# Altium PCB LTM4625.PcbDoc
Units mil, origin at the board's own origin, x right, y up, seen from the top; angles counter-clockwise.
Board outline 2220 x 625 mil, 2 copper layers (Top Layer, Bottom Layer); 31 components, 12 nets, 109 pads, 48 vias.
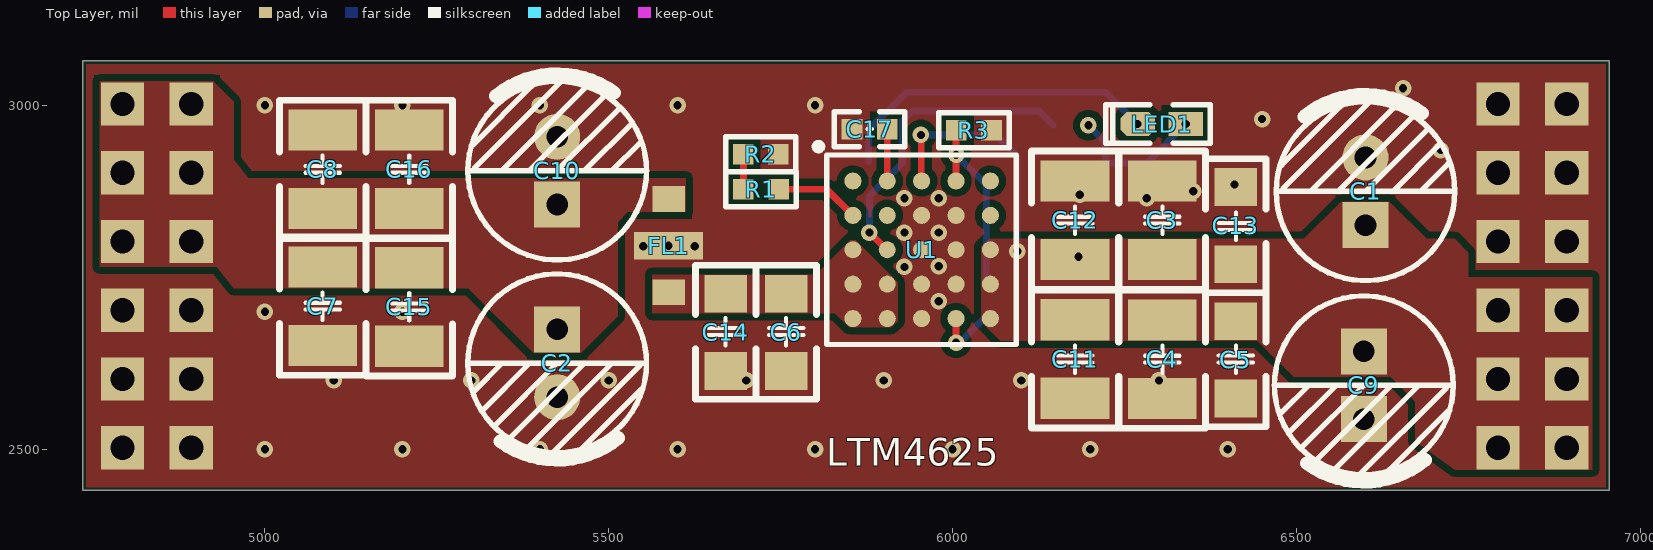
[diagram p0: Top Layer view]
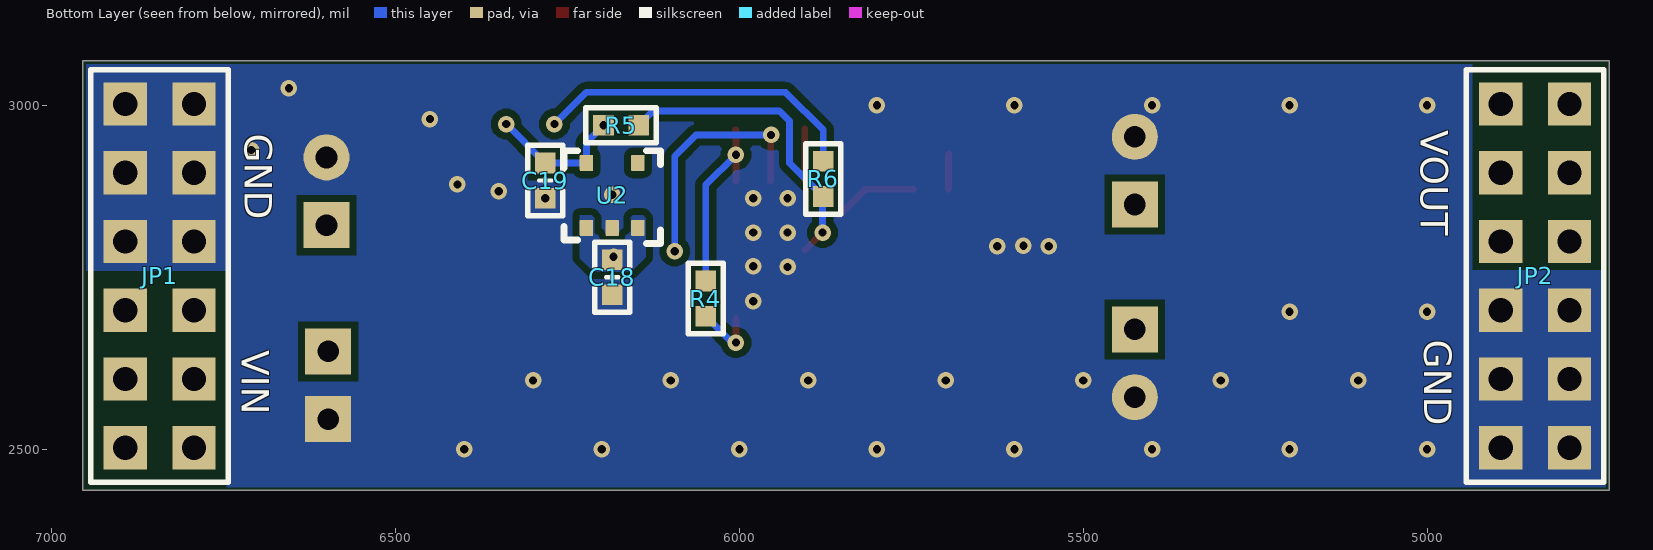
[diagram p1: Bottom Layer view, seen from below]

## Layer stack, top to bottom
Top Solder: solder mask 0.4, Solder Resist, Dk 3.5
Top Layer: signal copper 1.4
Dielectric 1: dielectric 12.6, FR-4, Dk 4.8
Bottom Layer: signal copper 1.4
Bottom Solder: solder mask 0.4, Solder Resist, Dk 3.5

## Board outline
4735,2440 6955,2440 6955,3065 4735,3065

## Design rules (kind name [scope] priority, off if disabled: settings)
Clearance [All] p1: gap=10 ignorepadtopadclearanceinfootprint=FALSE except(0: Arc-Hole Track-Hole SMDPad-Hole THPad-Hole Via-Hole Fill-Hole Poly-Hole Region-Hole Text-Hole)
PlaneConnect [All] p1: planeconnectstyle=Direct reliefexpansion=20 reliefentries=4 reliefconductorwidth=10 reliefairgap=10
PolygonConnect [All] p1: connectstyle=Direct reliefconductorwidth=10 reliefentries=4 polygonreliefangle="90 Angle" airgapwidth=10
RoutingVias [All] p1: holewidth=28 width=50 viastyle="Through Hole" minholewidth=28 minwidth=50 maxholewidth=28 maxwidth=50
SolderMaskExpansion [All] p1: expansion=4 istentingtop=FALSE
Width [All] p1: maxlimit=10 minlimit=10 preferedwidth=10
29 further rules are at their usual default settings.

## Components (designator, comment, footprint, x,y, rotation, side; value= is the part's Value field where it differs from the comment)
C1 "100uF" "CAP 2.5*6.3*7"#1 6600.42,2875.05 r90 top
C2 "100uF" "CAP 2.5*6.3*7"#1 5425,2625 r270 top
C3 "10uF" "C 1210_L" 6305,2833 r90 top
C4 "10uF" "C 1210_L" 6305,2630.91 r270 top
C5 "22uF" "C 1206_L" 6412,2631 r270 top
C6 "22uF" "C 1206_L" 5758,2671 r270 top
C7 "10uF" "C 1210_L" 5084,2707.91 r270 top
C8 "10uF" "C 1210_L" 5084,2907 r90 top
C9 "100uF" "CAP 2.5*6.3*7"#2 6598,2593 r270 top
C10 "100uF" "CAP 2.5*6.3*7"#1 5425,2905 r90 top
C11 "10uF" "C 1210_L" 6178,2631 r270 top
C12 "10uF" "C 1210_L" 6178,2833 r90 top
C13 "22uF" "C 1206_L" 6412,2824 r90 top
C14 "22uF" "C 1206_L" 5670,2671 r270 top
C15 "10uF" "C 1210_L" 5210,2706.91 r270 top
C16 "10uF" "C 1210_L" 5210,2907 r90 top
C17 "100nF" "C 0603_L" 5879.41,2965.42 r0 top
C18 "2.2uF" "C 0603_L" 6185,2750 r90 bottom
C19 "2.2uF" "C 0603_L" 6282.5,2890.66 r90 bottom
FL1 "NFM31KC104R1H3L" FIL_NFM31KC104R1H3L 5587,2796 r90 top
JP1 "Header 6X2" HDR2.54-LI-2x6P 6843,2752 r90 bottom
JP2 "Header 6X2" HDR2.54-LI-2x6P 4843,2752 r270 bottom
LED1 "红色" "LED 0603R" 6304,2973 r180 top
R1 "7.5K" "R 0603_L" 5721.41,2878 r180 top
R2 "50" "R 0603_L" 5721,2929 r0 top
R3 "?" "R 0603_L" 6031,2964 r180 top
R4 "?" "R 0603_L" 6049,2719 r270 bottom
R5 "10K" "R 0603_L" 6172,2971 r0 bottom
R6 "10K" "R 0603_L" 5878,2893 r270 bottom
U1 "LTM4625IY" FP-BGA-25-05-08-1905-MFG 5955,2790 r0 top
U2 "LR8323B-T18" DBV0005A_L 6185,2869 r90 bottom

## Footprints (in the part's own frame and the unit in brackets; to place one, negate y for a bottom-side part, rotate by r counter-clockwise, add the part's x,y. Pads: shape width x height; smd on the part's side, far side on the other; paste and mask are expansions set on the pad)
"C 0603_L" [mil] "无极性贴片电容"
  rect 30x30 smd: 1(-25.59,0) 2(25.59,0)
  silkscreen extent -51,-26 51,26, body extent -31,-16 31,16, height 32
"C 1206_L" [mil] "无极性贴片电容 https://item.taobao.com/item.htm?ft=t&id=613637044352"
  rect 55x62 smd: 1(-55.12,0) 2(57.09,0)
  silkscreen extent -96,-44 98,44, body extent -63,-32 63,32, height 48
"C 1210_L" [mil] "无极性贴片电容"
  rect 60x100 smd: 1(-57.09,0) 2(57.09,0)
  silkscreen extent -100,-63 100,63, body extent -63,-51 63,51, height 60
"CAP 2.5*6.3*7"#1 [mm] "脚距2.5mm直径6.3mm高度7mm"
  rect 1.7x1.7 hole 0.8: 1(-1.25,0)
  round 1.7 hole 0.8: 2(1.25,0)
  silkscreen extent -3.3,-3.3 3.56,3.3, body extent -3.15,-3.15 3.16,3.15, height 7.03
"CAP 2.5*6.3*7"#2 [mm] "脚距2.5mm直径6.3mm高度7mm"
  rect 1.7x1.7 hole 0.8: 1(-1.25,0) 2(1.25,0)
  silkscreen extent -3.3,-3.3 3.56,3.3, body extent -3.15,-3.15 3.16,3.15, height 7.03
DBV0005A_L [mm] "SOT23, 5-Leads, Body 3.05x1.75mm, Pitch 0.95mm, IPC High Density"
  rrect18% 0.6x0.5 smd mask+0.051: 1(-1.2,0.95) 2(-1.2,0) 3(-1.2,-0.95) 4(1.2,-0.95) 5(1.2,0.95)
  silkscreen extent -1.78,-1.78 1.65,1.78, body extent -1.42,-1.46 1.42,1.46, height 1.08
FIL_NFM31KC104R1H3L [mm]
  rect 0.95x1.2 smd mask+0: 1(-1.725,0) 3(1.725,0)
  rect 1.016x2.54 smd paste+0 mask+0: 2(0,0)
  body extent -1.6,-0.8 1.6,0.8, height 1.5
FP-BGA-25-05-08-1905-MFG [mm]
  round 0.63 smd paste+0 mask+0: A1(-2.54,2.54) A2(-1.27,2.54) A3(0,2.54) A4(1.27,2.54) A5(2.54,2.54) B1(-2.54,1.27) B2(-1.27,1.27) B3(0,1.27) B4(1.27,1.27) B5(2.54,1.27) C1(-2.54,0) C2(-1.27,0) C3(0,0) C4(1.27,0) C5(2.54,0) D1(-2.54,-1.27) D2(-1.27,-1.27) D3(0,-1.27) D4(1.27,-1.27) D5(2.54,-1.27) E1(-2.54,-2.54) E2(-1.27,-2.54) E3(0,-2.54) E4(1.27,-2.54) E5(2.54,-2.54)
  silkscreen extent -3.93,-3.5 3.5,3.93, body extent -3.7,-3.7 3.7,3.7, height 0.25
HDR2.54-LI-2x6P [mm] "双排排针，6x2脚"
  rect 1.6x1.6 hole 0.9: 1(-6.35,-1.27) 2(-6.35,1.27) 3(-3.81,-1.27) 4(-3.81,1.27) 5(-1.27,-1.27) 6(-1.27,1.27) 7(1.27,-1.27) 8(1.27,1.27) 9(3.81,-1.27) 10(3.81,1.27) 11(6.35,-1.27) 12(6.35,1.27)
  silkscreen extent -7.62,-2.54 7.62,2.54, body extent -7.62,-2.54 7.62,2.54, height 8.5
"LED 0603R" [mil] "红色0603LED"
  rect 50x35 smd: 1(-35,0.26)
  oct 50x35 smd: 2(35,0.26)
  silkscreen extent -71,-28 81,28, body extent -31,-16 31,16, height 18
"R 0603_L" [mil] "1/10W贴片电阻 https://item.taobao.com/item.htm?ft=t&id=613637044352"
  rect 30x30 smd: 1(-25.59,0) 2(25.59,0)
  silkscreen extent -51,-26 51,26, body extent -31,-16 32,16, height 16

## Part data
C1 C2 C9 C10: library part CE, "直插电解电容", BOM名称=直插电解电容, 下单链接=https://item.taobao.com/item.htm?ft=t&id=613637044352, 淘宝ID=小糖豆的小窝窝
C3 C4 C5 C6 C7 C8 C11 C12 C13 C14 C15 C16 C17 C18 C19: library part C, "贴片电容", BOM名称=贴片电容, 下单链接=https://item.taobao.com/item.htm?ft=t&id=613637044352, 淘宝ID=小糖豆的小窝窝
FL1: "SMD Capacitor with Capacitance: 0.10uF Tol. 20%. Rated Voltage: 50Vdc", Package=NONSTANDARD, Availability=Unavailable, MF=Murata, MP=NFM31KC104R1H3L, Price=None, SnapEDA_Link=https://www.snapeda.com/parts/NFM31KC104R1H3L/Murata/view-part/4377127/?ref=snap
JP1 JP2: library part "Header  6X2", "6*2P接插件", BOM名称=6*2P接插件, 下单链接=https://item.taobao.com/item.htm?ft=t&id=613637044352, 淘宝ID=小糖豆的小窝窝
LED1: library part LED-SMD, "贴片LED", BOM名称=贴片LED, 下单链接=https://item.taobao.com/item.htm?ft=t&id=613637044352, 淘宝ID=小糖豆的小窝窝
R1 R2 R3 R4 R5 R6: library part R, "贴片电阻", BOM名称=贴片电阻, 下单链接=https://item.taobao.com/item.htm?ft=t&id=613637044352, 淘宝ID=小糖豆的小窝窝
U1: "DC DC CONVERTER 0.6-5.5V", Case/Package=BGA, Max Input Voltage=20V, Max Operating Temperature=125°C, Max Output Current=5A, Min Input Voltage=4V, Min Operating Temperature=-40°C, Output Voltage=5.5V, Efficiency=91%, Features=UVLO, Height=0.07inch, Length=0.25inch, Mount="Surface Mount", Number of Outputs=1, Number of Pins=25, Output Current=5A, Packaging=Tray, RoHS Compliant=No, Series=µModule®, Voltage - Output 1=5.5V, Width=0.25inch
U2: "None"

## Via types
v1: diameter 24, hole 12, Top Layer to Bottom Layer, tented both sides, 48 vias

## Nets (pads, with @x,y where several pads share a name; then routed paths per layer and width w, separated by ;. In a path a pad name is that pad's centre, name@x,y a point inside that pad or via, vN(x,y) a via of type N, cw(c..) or ccw(c..) an arc to the next point about the centre after c; other vN are vias at no path point)
FREQ: R3.2 R4.1 U1.A4 | length 275.8
  Top Layer w10: U1.A4 v1(6005,2928) 6005,2963.59 R3.2
  Bottom Layer w10: v1(6005,2928) 6049,2884 R4.1
GND: C1.2 C2.2 C3.2 C4.2 C5.2 C6.2 C7.2 C8.2 C9.2 C10.2 C11.2 C12.2 C13.2 C14.2 C15.2 C16.2 C17.1 C18.1 C19.1 FL1.2 JP1.7 JP1.8 JP1.9 JP1.10 JP1.11 JP1.12 JP2.7 JP2.8 JP2.9 JP2.10 JP2.11 JP2.12 R2.2 R3.1 U1.B3 U1.B4 U1.C3 U1.C4 U1.D3 U1.D4 U1.E3 U2.2
  other v1: 5000,2500 5200,2500 5400,2500 5600,2500 5800,2500 6000,2500 6200,2500 6400,2500 5100,2600 5300,2600 5500,2600 5700,2600 5900,2600 6100,2600 6300,2600 5000,2700 5200,2700 5980,2715 5930,2765 5980,2766 5550,2795 5625,2795 5587,2796 5930,2815 5980,2815 5930,2865 5980,2865 6282.5,2865.06 6185,2870 6350,2875 6410,2885 6710,2935 6450,2980 5000,3000 5200,3000 5400,3000 5600,3000 5800,3000 6655,3025
INTVCC: R4.2 U1.E4 | length 94.9
  Top Layer w10: v1(6005,2655) U1.E4
  Bottom Layer w10: v1(6005,2655) 6007.68,2657.68 6013.27,2657.68 R4.2
NetC6_1: C6.1 C14.1 FL1.1 U1.C1 U1.D1 U1.D2 U1.E1 U1.E2
NetC17_2: C17.2 U1.A2 | length 75.4
  Top Layer w10: U1.A2 C17.2
NetC19_2: C19.2 LED1.1 R5.2 U2.5 | length 207.5
  Bottom Layer w10: R5.2@6199.32,2972.74 v1(6197.59,2971) 6222.4,2946.19 U2.5 C19.2 v1(6339,2972.74)
NetLED1_2: LED1.2 R6.1 | length 478.3
  Bottom Layer w10: R6.1 5878,2964 5933,3019 6222.74,3019 v1(6269,2972.74)
NetR1_1: R1.1 U1.B1 | length 123.7
  Top Layer w10: R1.1 5817,2878 U1.B1
NetR1_2: R1.2 R2.1 | length 51.7
  Top Layer w10: R2.1@5695,2928.59 R2.1 5695.82,2928.58 R1.2
PGOOD: R5.1 R6.2 U1.C2 | length 452.6
  Top Layer w10: v1(5879,2815) 5879.5,2815 5904.5,2790 U1.C2
  Bottom Layer w10: v1(5879,2815) 5879,2868.41 5899.18,2888.59 5927,2916.38 5927,2977 5942,2992 6125.41,2992 R5.1
VIN: C1.1 C3.1 C4.1 C5.1 C9.1 C11.1 C12.1 C13.1 C18.2 JP1.1 JP1.2 JP1.3 JP1.4 JP1.5 JP1.6 U1.A3 U1.C5 U1.D5 U1.E5 U2.1 U2.3 | length 358.3
  Top Layer w10: v1(5954,2957) 5954.5,2956.5 5954.5,2890.5 U1.A3
  Bottom Layer w10: v1(5954,2957) 6063,2957 6094,2926 v1(6094,2788)
  other v1: 6183,2780
VOUT: C2.1 C7.1 C8.1 C10.1 C15.1 C16.1 FL1.3 JP2.1 JP2.2 JP2.3 JP2.4 JP2.5 JP2.6
pads on no net: U1.A1 U1.A5 U1.B2 U1.B5 U2.4

## Polygon pours and split planes (outlines as drawn)
GND on Top Layer "NONET_L-01_P-001" (solid, remove dead copper, pour order 14): 4740,3060 6950,3060 6950,2445 4740,2445
VIN on Top Layer "NONET_L-01_P-001" (solid, remove dead copper, pour order 12): 6730,2806 6750,2786 6750,2750 6930,2750 6930,2470.27 6730,2470.27
VIN on Top Layer "NONET_L-01_P-001" (solid, remove dead copper, pour order 11): 6510,2805 6565,2860 6635,2860 6690,2805
VIN on Top Layer "NONET_L-01_P-001" (solid, remove dead copper, pour order 2): 6730,2806 6730,2470.27 6673,2511.85 6673,2569 6637,2605 6496,2605 6443,2658 6128,2658 6128,2806 6443,2806
VOUT on Top Layer "NONET_L-01_P-001" (solid, pour order 10): 4940,2940 4940,2870 4995,2870
VOUT on Top Layer "NONET_L-01_P-001" (solid, remove dead copper, pour order 9): 4955,2734 4930,2765 4760,2765 4760,3035 4925,3035 4955,3005
VOUT on Top Layer "NONET_L-01_P-001" (solid, remove dead copper, pour order 7): 4955,2894 4955,2734 5069,2734 5296,2734 5390,2640 5460,2640 5513,2693 5513,2830 5528,2845 5612,2845 5612,2894 5458,2894 5063,2894
NetC6_1 on Top Layer "NONET_L-01_P-001" (solid, remove dead copper, pour order 5): 5918.98,2744.02 5859,2804 5851,2804 5801,2754 5563,2754 5563,2698 5829,2698 5850,2677 5911,2677 5920,2686 5920,2743.04
VIN on Top Layer "NONET_L-01_P-001" (solid, remove dead copper, pour order 3): 6128,2806 6053,2806 6042,2795 6042,2685 6069,2658 6128,2658
GND on Bottom Layer "NONET_L-01_P-001" (solid, remove dead copper, pour order 13): 4740,3060 6950,3060 6950,2445 4740,2445
VIN on Bottom Layer "NONET_L-01_P-001" (solid, remove dead copper, pour order 0): 6140,2840 6136,2836 6136,2779 6157,2758 6212,2758 6232,2778 6232,2840 6214,2840 6211,2837 6211,2815 6208,2812 6163,2812 6158,2817 6158,2837 6155,2840

## Other copper
Bottom Layer:
  pour cut-out: 6745.5,2759.5 6950,2759.5 6950,2445 6745.5,2445
  pour cut-out: 4740,3060 4934.5,3060 4934.5,2760.5 4740,2760.5

## Silkscreen, mask and mechanical layers (free items; w line width, h text height)
Top Overlay:
  text "LTM4625" at 5816,2476 h40
Bottom Overlay:
  text "VOUT" at 5009,2964 h40 r90
  text "GND" at 6719,2959 h40 r90
  text "GND" at 5004,2659 h40 r90
  text "VIN" at 6724,2644 h40 r90
Mechanical 1:
  the board outline again, w6